# EAGLE board ESP32-Function-Panel (EAGLE 9.6.2), part 1 of 2
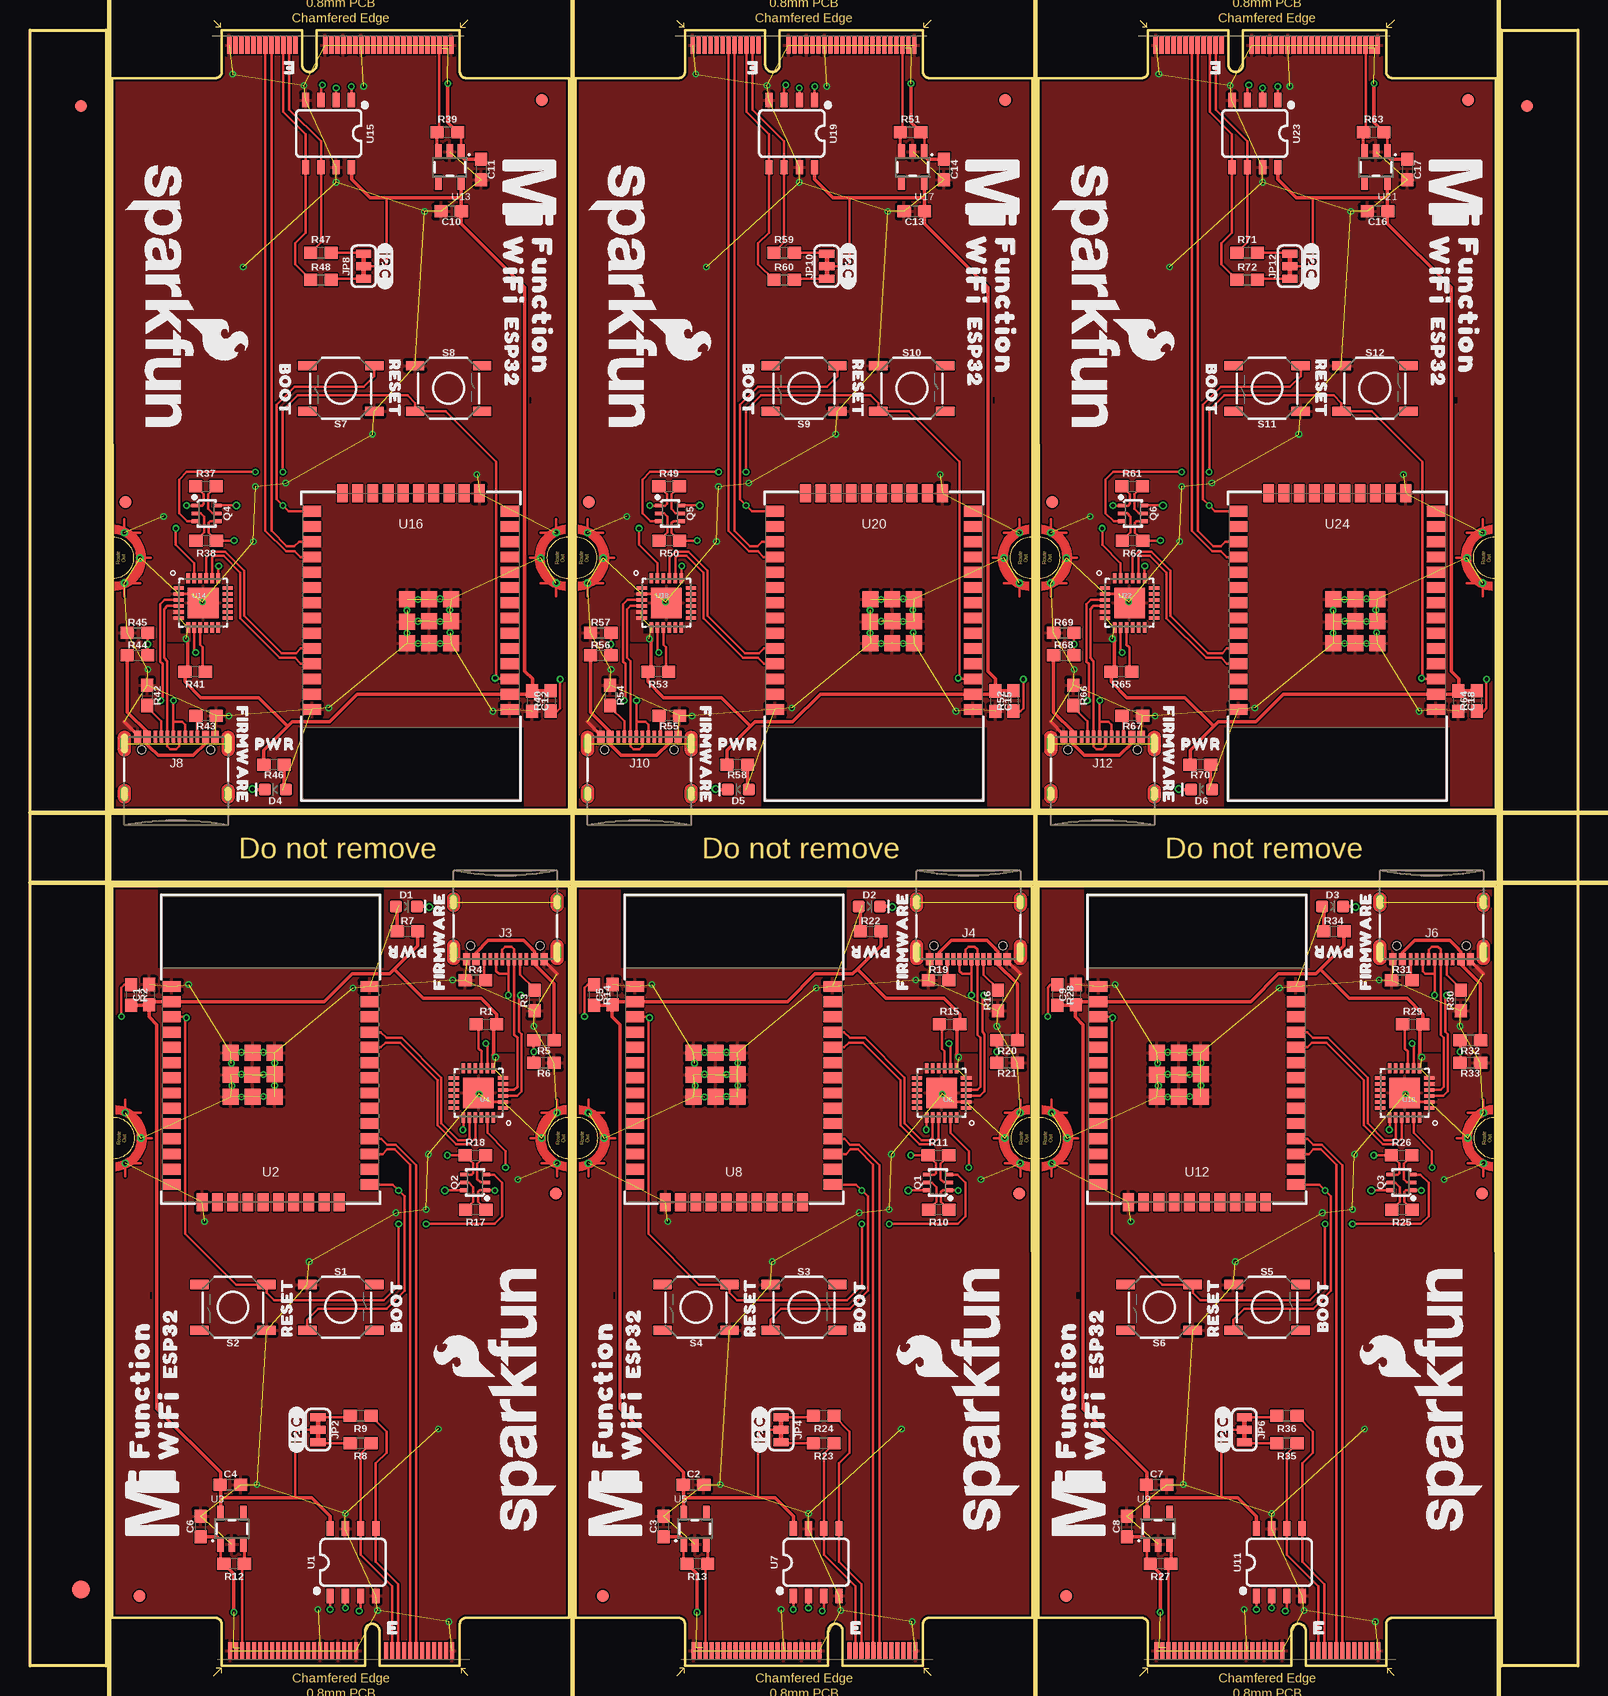
[diagram p0: board, top side]
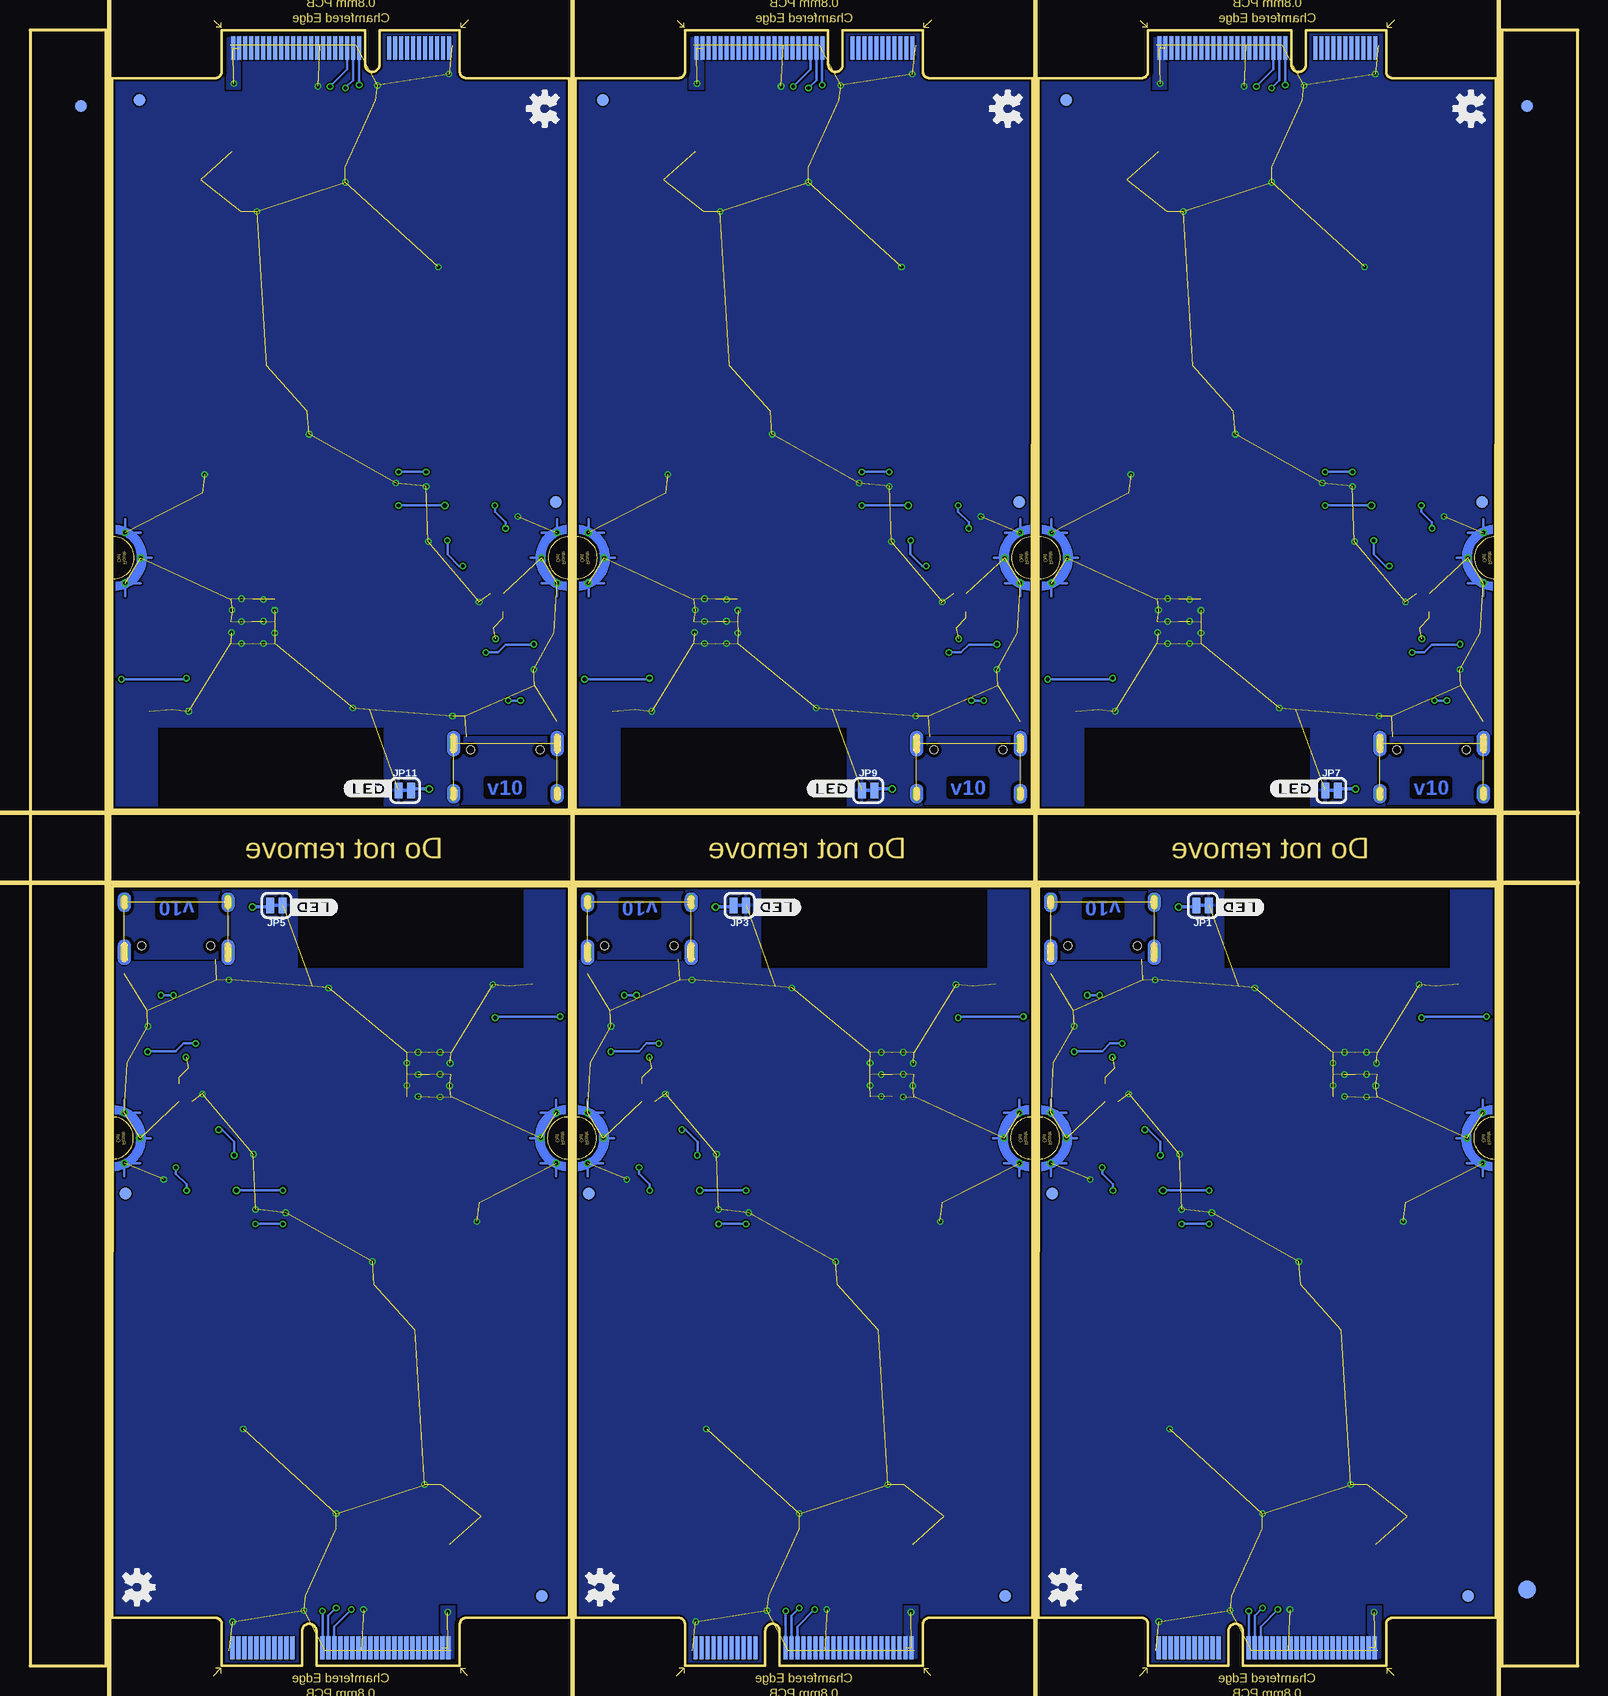
[diagram p1: board, bottom side, seen from below]

Size 129.03 x 136.32 mm. Coordinates in mm from the lower left corner, seen from the top.
Outline: 35.83,0 29.13,0 29.13,2.9 arc180 27.93,2.9 27.93,0 15.98,0 15.98,3.5 arc84 15.51,4 6.86,4 6.86,64.98 44.93,64.98 44.96,4 36.31,4 arc85 35.83,3.5 35.83,0
Outline: 74.44,0 67.74,0 67.74,2.9 arc180 66.54,2.9 66.54,0 54.59,0 54.59,3.5 arc84 54.12,4 45.47,4 45.47,64.98 83.54,64.98 83.57,4 74.92,4 arc85 74.44,3.5 74.44,0
Outline: 113.05,0 106.35,0 106.35,2.9 arc180 105.15,2.9 105.15,0 93.2,0 93.2,3.5 arc84 92.72,4 84.07,4 84.07,64.98 122.15,64.98 122.17,4 113.52,4 arc85 113.05,3.5 113.05,0
Outline: 15.98,136.32 22.68,136.32 22.68,133.42 arc180 23.88,133.42 23.88,136.32 35.83,136.32 35.83,132.82 arc84 36.31,132.32 44.96,132.32 44.96,71.34 6.88,71.34 6.86,132.32 15.51,132.32 arc85 15.98,132.82 15.98,136.32
Outline: 54.59,136.32 61.29,136.32 61.29,133.42 arc180 62.49,133.42 62.49,136.32 74.44,136.32 74.44,132.82 arc84 74.92,132.32 83.57,132.32 83.57,71.34 45.49,71.34 45.47,132.32 54.12,132.32 arc85 54.59,132.82 54.59,136.32
Outline: 93.2,136.32 99.9,136.32 99.9,133.42 arc180 101.1,133.42 101.1,136.32 113.05,136.32 113.05,132.82 arc84 113.52,132.32 122.17,132.32 122.17,71.34 84.1,71.34 84.07,132.32 92.72,132.32 arc85 93.2,132.82 93.2,136.32
Outline: 122.68,136.32 129.03,136.32 129.03,0 122.68,0 122.68,136.32
Outline: 0,136.32 6.35,136.32 6.35,0 0,0 0,136.32
Copper layers (1*16): Top 0.035mm / dielectric 1.5mm / Bottom 0.035mm
Design rules "ESP32-Function": minimum track width 5mil, minimum drill 0.3mm, track to track 5mil, track to pad 5mil, pad to pad 5mil, via to via 5mil, smd to smd 5mil, copper to edge 7mil, drill to drill 7mil, minimum pad ring 5mil, minimum via ring 5mil, stop-mask expansion 2.5mil, vias tented up to drill 25mil, thermal gap 10mil
tRestrict: area 10,30.6 to 10.2,31.1; area 10.7,58.2 to 29.5,64.8; area 48.6,30.6 to 48.8,31.1; area 49.3,58.2 to 68.1,64.8; area 87.2,30.6 to 87.4,31.1; area 87.9,58.2 to 106.7,64.8; area 41.7,105.2 to 41.8,105.7; area 22.4,71.6 to 41.1,78.2; area 80.3,105.2 to 80.4,105.7; area 61,71.6 to 79.8,78.2; area 118.9,105.2 to 119,105.7; area 99.6,71.6 to 118.4,78.2
bRestrict: area 10.7,58.2 to 29.5,64.8; area 49.3,58.2 to 68.1,64.8; area 87.9,58.2 to 106.7,64.8; area 22.4,71.6 to 41.1,78.2; area 61,71.6 to 79.8,78.2; area 99.6,71.6 to 118.4,78.2
Milling: 6 lines

## Footprints (pad centres in the part's own frame; a part is rotated, then mirrored left to right if it is on the bottom)
0603 = smd 1.1 x 1: 1 -0.85,0; 2 0.85,0
LED-0603 = smd 1 x 1: A -0.877,0; C 0.877,0
FIDUCIAL-1X2 = smd 1 x 1: 1 0,0
FIDUCIAL-1.5X3 = smd 1.5 x 1.5: 1 0,0
M.2-CARD-E-22_FUNCTION_STANDARD = smd 0.35 x 1.45: 1 9.25,1.275; 3 8.75,1.275; 5 8.25,1.275; 7 7.75,1.275; 9 7.25,1.275; 11 6.75,1.275; 13 6.25,1.275; 15 5.75,1.275; 17 5.25,1.275; 19 4.75,1.275; 21 4.25,1.275; 23 3.75,1.275; 33 1.25,1.275; 35 0.75,1.275; 37 0.25,1.275; 39 -0.25,1.275; 41 -0.75,1.275; 43 -1.25,1.275; 45 -1.75,1.275; 47 -2.25,1.275; 49 -2.75,1.275; 51 -3.25,1.275; 53 -3.75,1.275; 55 -4.25,1.275; 57 -4.75,1.275; 59 -5.25,1.275; 61 -5.75,1.275; 63 -6.25,1.275; 65 -6.75,1.275; 67 -7.25,1.275; 69 -7.75,1.275; 71 -8.25,1.275; 73 -8.75,1.275; 75 -9.25,1.275 | smd 0.35 x 1.95 bottom: 2 9,1.525; 4 8.5,1.525; 6 8,1.525; 8 7.5,1.525; 10 7,1.525; 12 6.5,1.525; 14 6,1.525; 16 5.5,1.525; 18 5,1.525; 20 4.5,1.525; 22 4,1.525; 32 1.5,1.525; 34 1,1.525; 36 0.5,1.525; 38 0,1.525; 40 -0.5,1.525; 42 -1,1.525; 44 -1.5,1.525; 46 -2,1.525; 48 -2.5,1.525; 50 -3,1.525; 52 -3.5,1.525; 54 -4,1.525; 56 -4.5,1.525; 58 -5,1.525; 60 -5.5,1.525; 62 -6,1.525; 64 -6.5,1.525; 66 -7,1.525; 68 -7.5,1.525; 70 -8,1.525; 72 -8.5,1.525; 74 -9,1.525 | drill 0.305 pad 0.61: GND1 -18,41.9; GND2 -16.7,44; GND3 -18,46.1; GND4 18,41.9; GND5 16.7,44; GND6 18,46.1
USB-C-16P-2LAYER-PADS = smd 0.3 x 1: A5 -1.25,-0.34; A6 -0.25,-0.34; A7 0.25,-0.34; A8 1.25,-0.34; B5 1.75,-0.34; B6 0.75,-0.34; B7 -0.75,-0.34; B8 -1.75,-0.34 | smd 0.6 x 1: GND -3.225,-0.34; GND2 3.225,-0.34; VBUS1 -2.45,-0.34; VBUS2 2.45,-0.34 | drill 0.4 pad 0.6 long: SHLD1 -4.318,-0.915; SHLD2 4.318,-0.915; SHLD3 -4.318,-5.095; SHLD4 4.318,-5.095 | hole 0.65: -2.89,-1.445; 2.89,-1.445
SMT-JUMPER_2_NC_TRACE_SILK = smd 0.66 x 1.27: 1 -0.521,0; 2 0.521,0
SMT-JUMPER_3_2-NC_TRACE_SILK = smd 0.66 x 1.27: 1 -1.041,0; 2 0,0; 3 1.041,0
SC70-6 = smd 0.3 x 0.66: 1 -0.65,-0.92; 2 0,-0.92; 3 0.65,-0.92; 4 0.65,0.92; 5 0,0.92; 6 -0.65,0.92
TACTILE_SWITCH_SMD_5.2MM = smd 1.524 x 0.762: 1 -2.794,1.905; 2 2.794,1.905; 3 -2.794,-1.905; 4 2.794,-1.905
TP_15TH = drill 0.381 pad 0.61: 1 0,0
SO08 = smd 0.6 x 1.2: 1 -1.905,-2.8; 2 -0.635,-2.8; 3 0.635,-2.8; 4 1.905,-2.8; 5 1.905,2.8; 6 0.635,2.8; 7 -0.635,2.8; 8 -1.905,2.8
ESP-WROOM-32D-NARROW = smd 0.9 x 1.5: 1 6.43,8.238; 2 5.16,8.238; 3 3.89,8.238; 4 2.62,8.238; 5 1.35,8.238; 6 0.08,8.238; 7 -1.19,8.238; 8 -2.46,8.238; 9 -3.73,8.238; 10 -5,8.238; 11 -6.27,8.238; 12 -7.54,8.238; 13 -8.81,8.238; 14 -10.08,8.238; 25 -10.08,-8.238; 26 -8.81,-8.238; 27 -7.54,-8.238; 28 -6.27,-8.238; 29 -5,-8.238; 30 -3.73,-8.238; 31 -2.46,-8.238; 32 -1.19,-8.238; 33 0.08,-8.238; 34 1.35,-8.238; 35 2.62,-8.238; 36 3.89,-8.238; 37 5.16,-8.238; 38 6.43,-8.238 | smd 1.5 x 0.9: 15 -11.57,5.715; 16 -11.57,4.445; 17 -11.57,3.175; 18 -11.57,1.905; 19 -11.57,0.635; 20 -11.57,-0.635; 21 -11.57,-1.905; 22 -11.57,-3.175; 23 -11.57,-4.445; 24 -11.57,-5.715 | smd 1.33 x 1.33: GND1 -0.912,1.531; GNDT1 -2.751,3.346; GNDT2 -2.761,1.516; GNDT3 -2.751,-0.314; GNDT4 -0.891,-0.324; GNDT5 0.909,-0.314; GNDT6 0.909,1.516; GNDT7 0.909,3.346; GNDT8 -0.921,3.346
SOT23-5 = smd 0.55 x 1.2: 1 -0.95,-1.3; 2 0,-1.3; 3 0.95,-1.3; 4 0.95,1.3; 5 -0.95,1.3
QFN24 = smd 0.85 x 0.3: 1 -2.05,1.25; 2 -2.05,0.75; 3 -2.05,0.25; 4 -2.05,-0.25; 5 -2.05,-0.75; 6 -2.05,-1.25; 13 2.05,-1.25; 14 2.05,-0.75; 15 2.05,-0.25; 16 2.05,0.25; 17 2.05,0.75; 18 2.05,1.25 | smd 0.3 x 0.85: 7 -1.25,-2.05; 8 -0.75,-2.05; 9 -0.25,-2.05; 10 0.25,-2.05; 11 0.75,-2.05; 12 1.25,-2.05; 19 1.25,2.05; 20 0.75,2.05; 21 0.25,2.05; 22 -0.25,2.05; 23 -0.75,2.05; 24 -1.25,2.05 | smd 2.55 x 2.55: PAD 0,0

## Placement (x,y rotation side)
C1  0.1uF  [0603]  9.96,55.93 90 top
C2  1.0uF  [0603]  55.31,15.11 0 top
C3  1.0uF  [0603]  52.83,11.62 90 top
C4  1.0uF  [0603]  16.7,15.11 0 top
C5  0.1uF  [0603]  48.56,55.93 90 top
C6  1.0uF  [0603]  14.22,11.62 90 top
C7  1.0uF  [0603]  93.92,15.11 0 top
C8  1.0uF  [0603]  91.44,11.62 90 top
C9  0.1uF  [0603]  87.17,55.93 90 top
C10  1.0uF  [0603]  35.12,121.21 180 top
C11  1.0uF  [0603]  37.59,124.7 270 top
C12  0.1uF  [0603]  41.86,80.39 270 top
C13  1.0uF  [0603]  73.72,121.21 180 top
C14  1.0uF  [0603]  76.2,124.7 270 top
C15  0.1uF  [0603]  80.47,80.39 270 top
C16  1.0uF  [0603]  112.33,121.21 180 top
C17  1.0uF  [0603]  114.81,124.7 270 top
C18  0.1uF  [0603]  119.08,80.39 270 top
D1  RED  [LED-0603]  31.37,63.3 0 top
D2  RED  [LED-0603]  69.98,63.3 0 top
D3  RED  [LED-0603]  108.59,63.3 0 top
D4  RED  [LED-0603]  20.45,73.03 180 top
D5  RED  [LED-0603]  59.05,73.03 180 top
D6  RED  [LED-0603]  97.66,73.03 180 top
E$1  [FIDUCIAL-1X2]  4.23,129.97 0 top
E$2  [FIDUCIAL-1X2]  4.23,129.97 0 bottom
E$3  [FIDUCIAL-1X2]  124.8,129.97 0 top
E$4  [FIDUCIAL-1X2]  124.8,129.97 0 bottom
E$5  [FIDUCIAL-1.5X3]  4.23,6.35 0 top
E$6  [FIDUCIAL-1.5X3]  4.23,6.35 0 bottom
FD1  FIDUCIAL1X2  [FIDUCIAL-1X2]  9.14,5.84 270 bottom
FD2  FIDUCIAL1X2  [FIDUCIAL-1X2]  43.84,39.34 270 bottom
FD3  FIDUCIAL1X2  [FIDUCIAL-1X2]  9.14,5.84 90 top
FD4  FIDUCIAL1X2  [FIDUCIAL-1X2]  43.84,39.34 90 top
FD5  FIDUCIAL1X2  [FIDUCIAL-1X2]  47.75,5.84 270 bottom
FD6  FIDUCIAL1X2  [FIDUCIAL-1X2]  47.75,5.84 90 top
FD7  FIDUCIAL1X2  [FIDUCIAL-1X2]  82.45,39.34 270 bottom
FD8  FIDUCIAL1X2  [FIDUCIAL-1X2]  82.45,39.34 90 top
FD9  FIDUCIAL1X2  [FIDUCIAL-1X2]  86.36,5.84 270 bottom
FD10  FIDUCIAL1X2  [FIDUCIAL-1X2]  86.36,5.84 90 top
FD11  FIDUCIAL1X2  [FIDUCIAL-1X2]  121.06,39.34 270 bottom
FD12  FIDUCIAL1X2  [FIDUCIAL-1X2]  121.06,39.34 90 top
FD13  FIDUCIAL1X2  [FIDUCIAL-1X2]  42.67,130.48 90 bottom
FD14  FIDUCIAL1X2  [FIDUCIAL-1X2]  42.67,130.48 270 top
FD15  FIDUCIAL1X2  [FIDUCIAL-1X2]  7.98,96.98 90 bottom
FD16  FIDUCIAL1X2  [FIDUCIAL-1X2]  7.98,96.98 270 top
FD17  FIDUCIAL1X2  [FIDUCIAL-1X2]  81.28,130.48 90 bottom
FD18  FIDUCIAL1X2  [FIDUCIAL-1X2]  81.28,130.48 270 top
FD19  FIDUCIAL1X2  [FIDUCIAL-1X2]  46.58,96.98 90 bottom
FD20  FIDUCIAL1X2  [FIDUCIAL-1X2]  46.58,96.98 270 top
FD21  FIDUCIAL1X2  [FIDUCIAL-1X2]  119.89,130.48 90 bottom
FD22  FIDUCIAL1X2  [FIDUCIAL-1X2]  119.89,130.48 270 top
FD23  FIDUCIAL1X2  [FIDUCIAL-1X2]  85.19,96.98 90 bottom
FD24  FIDUCIAL1X2  [FIDUCIAL-1X2]  85.19,96.98 270 top
J1  MICROMOD_STANDARD  [M.2-CARD-E-22_FUNCTION_STANDARD]  25.94,-0.01 0 top
J2  MICROMOD_STANDARD  [M.2-CARD-E-22_FUNCTION_STANDARD]  64.55,-0.01 0 top
J3  [USB-C-16P-2LAYER-PADS]  39.62,58.55 180 top
J4  [USB-C-16P-2LAYER-PADS]  78.23,58.55 180 top
J5  MICROMOD_STANDARD  [M.2-CARD-E-22_FUNCTION_STANDARD]  103.16,-0.01 0 top
J6  [USB-C-16P-2LAYER-PADS]  116.84,58.55 180 top
J7  MICROMOD_STANDARD  [M.2-CARD-E-22_FUNCTION_STANDARD]  25.87,136.33 180 top
J8  [USB-C-16P-2LAYER-PADS]  12.19,77.77 0 top
J9  MICROMOD_STANDARD  [M.2-CARD-E-22_FUNCTION_STANDARD]  64.48,136.33 180 top
J10  [USB-C-16P-2LAYER-PADS]  50.8,77.77 0 top
J11  MICROMOD_STANDARD  [M.2-CARD-E-22_FUNCTION_STANDARD]  103.09,136.33 180 top
J12  [USB-C-16P-2LAYER-PADS]  89.41,77.77 0 top
JP1  JUMPER-SMT_2_NC_TRACE_SILK  [SMT-JUMPER_2_NC_TRACE_SILK]  31.27,63.37 180 bottom
JP2  JUMPER-SMT_3_2-NC_TRACE_SILK  [SMT-JUMPER_3_2-NC_TRACE_SILK]  24,19.68 270 top
JP3  JUMPER-SMT_2_NC_TRACE_SILK  [SMT-JUMPER_2_NC_TRACE_SILK]  69.88,63.37 180 bottom
JP4  JUMPER-SMT_3_2-NC_TRACE_SILK  [SMT-JUMPER_3_2-NC_TRACE_SILK]  62.61,19.68 270 top
JP5  JUMPER-SMT_2_NC_TRACE_SILK  [SMT-JUMPER_2_NC_TRACE_SILK]  108.48,63.37 180 bottom
JP6  JUMPER-SMT_3_2-NC_TRACE_SILK  [SMT-JUMPER_3_2-NC_TRACE_SILK]  101.22,19.68 270 top
JP7  JUMPER-SMT_2_NC_TRACE_SILK  [SMT-JUMPER_2_NC_TRACE_SILK]  20.55,72.95 0 bottom
JP8  JUMPER-SMT_3_2-NC_TRACE_SILK  [SMT-JUMPER_3_2-NC_TRACE_SILK]  27.81,116.64 90 top
JP9  JUMPER-SMT_2_NC_TRACE_SILK  [SMT-JUMPER_2_NC_TRACE_SILK]  59.16,72.95 0 bottom
JP10  JUMPER-SMT_3_2-NC_TRACE_SILK  [SMT-JUMPER_3_2-NC_TRACE_SILK]  66.42,116.64 90 top
JP11  JUMPER-SMT_2_NC_TRACE_SILK  [SMT-JUMPER_2_NC_TRACE_SILK]  97.76,72.95 0 bottom
JP12  JUMPER-SMT_3_2-NC_TRACE_SILK  [SMT-JUMPER_3_2-NC_TRACE_SILK]  105.03,116.64 90 top
LOGO1  SFE_LOGO_NAME_FLAME.2_INCH  [SFE_LOGO_NAME_FLAME_.2]  79.6,22.25 90 top
LOGO2  SFE_LOGO_NAME_FLAME.2_INCH  [SFE_LOGO_NAME_FLAME_.2]  41,22.25 90 top
LOGO3  OSHW-LOGOS  [OSHW-LOGO-S]  42.9,6.55 270 bottom
LOGO4  OSHW-LOGOS  [OSHW-LOGO-S]  81.51,6.55 270 bottom
LOGO5  SFE_LOGO_NAME_FLAME.2_INCH  [SFE_LOGO_NAME_FLAME_.2]  118.21,22.25 90 top
LOGO6  OSHW-LOGOS  [OSHW-LOGO-S]  120.12,6.55 270 bottom
LOGO7  SFE_LOGO_NAME_FLAME.2_INCH  [SFE_LOGO_NAME_FLAME_.2]  10.82,114.07 270 top
LOGO8  OSHW-LOGOS  [OSHW-LOGO-S]  8.92,129.77 90 bottom
LOGO9  SFE_LOGO_NAME_FLAME.2_INCH  [SFE_LOGO_NAME_FLAME_.2]  49.43,114.07 270 top
LOGO10  OSHW-LOGOS  [OSHW-LOGO-S]  47.52,129.77 90 bottom
LOGO11  SFE_LOGO_NAME_FLAME.2_INCH  [SFE_LOGO_NAME_FLAME_.2]  88.04,114.07 270 top
LOGO12  OSHW-LOGOS  [OSHW-LOGO-S]  86.13,129.77 90 bottom
Q1  MBT3904DW1T1  [SC70-6]  75.7,40.28 90 top
Q2  MBT3904DW1T1  [SC70-6]  37.09,40.28 90 top
Q3  MBT3904DW1T1  [SC70-6]  114.31,40.28 90 top
Q4  MBT3904DW1T1  [SC70-6]  14.73,96.04 270 top
Q5  MBT3904DW1T1  [SC70-6]  53.33,96.04 270 top
Q6  MBT3904DW1T1  [SC70-6]  91.94,96.04 270 top
R1  10k  [0603]  38.05,53.47 0 top
R2  10k  [0603]  8.43,55.91 270 top
R3  5.1k  [0603]  42.06,55.45 90 top
R4  5.1k  [0603]  37.13,57.15 0 top
R5  22k  [0603]  42.85,52.12 180 top
R6  33k  [0603]  42.85,50.24 180 top
R7  1k  [0603]  31.47,61.21 0 top
R8  4.7k  [0603]  27.56,18.54 180 top
R9  4.7k  [0603]  27.56,20.83 180 top
R10  10k  [0603]  75.76,38.02 180 top
R11  10k  [0603]  75.73,42.55 0 top
R12  100k  [0603]  17.02,8.51 180 top
R13  100k  [0603]  55.63,8.51 180 top
R14  10k  [0603]  47.04,55.91 270 top
R15  10k  [0603]  76.66,53.47 0 top
R16  5.1k  [0603]  80.67,55.45 90 top
R17  10k  [0603]  37.15,38.02 180 top
R18  10k  [0603]  37.13,42.55 0 top
R19  5.1k  [0603]  75.74,57.15 0 top
R20  22k  [0603]  81.46,52.12 180 top
R21  33k  [0603]  81.46,50.24 180 top
R22  1k  [0603]  70.08,61.21 0 top
R23  4.7k  [0603]  66.17,18.54 180 top
R24  4.7k  [0603]  66.17,20.83 180 top
R25  10k  [0603]  114.37,38.02 180 top
R26  10k  [0603]  114.34,42.55 0 top
R27  100k  [0603]  94.23,8.51 180 top
R28  10k  [0603]  85.65,55.91 270 top
R29  10k  [0603]  115.27,53.47 0 top
R30  5.1k  [0603]  119.28,55.45 90 top
R31  5.1k  [0603]  114.35,57.15 0 top
R32  22k  [0603]  120.07,52.12 180 top
R33  33k  [0603]  120.07,50.24 180 top
R34  1k  [0603]  108.69,61.21 0 top
R35  4.7k  [0603]  104.78,18.54 180 top
R36  4.7k  [0603]  104.78,20.83 180 top
R37  10k  [0603]  14.67,98.3 0 top
R38  10k  [0603]  14.69,93.78 180 top
R39  100k  [0603]  34.8,127.81 0 top
R40  10k  [0603]  43.38,80.42 90 top
R41  10k  [0603]  13.77,82.85 180 top
R42  5.1k  [0603]  9.75,80.87 270 top
R43  5.1k  [0603]  14.68,79.17 180 top
R44  22k  [0603]  8.97,84.2 0 top
R45  33k  [0603]  8.97,86.08 0 top
R46  1k  [0603]  20.35,75.11 180 top
R47  4.7k  [0603]  24.26,117.78 0 top
R48  4.7k  [0603]  24.26,115.49 0 top
R49  10k  [0603]  53.27,98.3 0 top
R50  10k  [0603]  53.3,93.78 180 top
R51  100k  [0603]  73.41,127.81 0 top
R52  10k  [0603]  81.99,80.42 90 top
R53  10k  [0603]  52.37,82.85 180 top
R54  5.1k  [0603]  48.36,80.87 270 top
R55  5.1k  [0603]  53.29,79.17 180 top
R56  22k  [0603]  47.57,84.2 0 top
R57  33k  [0603]  47.57,86.08 0 top
R58  1k  [0603]  58.95,75.11 180 top
R59  4.7k  [0603]  62.86,117.78 0 top
R60  4.7k  [0603]  62.86,115.49 0 top
R61  10k  [0603]  91.88,98.3 0 top
R62  10k  [0603]  91.91,93.78 180 top
R63  100k  [0603]  112.01,127.81 0 top
R64  10k  [0603]  120.6,80.42 90 top
R65  10k  [0603]  90.98,82.85 180 top
R66  5.1k  [0603]  86.97,80.87 270 top
R67  5.1k  [0603]  91.9,79.17 180 top
R68  22k  [0603]  86.18,84.2 0 top
R69  33k  [0603]  86.18,86.08 0 top
R70  1k  [0603]  97.56,75.11 180 top
R71  4.7k  [0603]  101.47,117.78 0 top
R72  4.7k  [0603]  101.47,115.49 0 top
S1  MOMENTARY-SWITCH-SPST-SMD-5.2MM-TALL  [TACTILE_SWITCH_SMD_5.2MM]  25.91,29.87 0 top
S2  MOMENTARY-SWITCH-SPST-SMD-5.2MM-TALL  [TACTILE_SWITCH_SMD_5.2MM]  16.92,29.87 180 top
S3  MOMENTARY-SWITCH-SPST-SMD-5.2MM-TALL  [TACTILE_SWITCH_SMD_5.2MM]  64.52,29.87 0 top
S4  MOMENTARY-SWITCH-SPST-SMD-5.2MM-TALL  [TACTILE_SWITCH_SMD_5.2MM]  55.52,29.87 180 top
S5  MOMENTARY-SWITCH-SPST-SMD-5.2MM-TALL  [TACTILE_SWITCH_SMD_5.2MM]  103.12,29.87 0 top
S6  MOMENTARY-SWITCH-SPST-SMD-5.2MM-TALL  [TACTILE_SWITCH_SMD_5.2MM]  94.13,29.87 180 top
S7  MOMENTARY-SWITCH-SPST-SMD-5.2MM-TALL  [TACTILE_SWITCH_SMD_5.2MM]  25.91,106.45 180 top
S8  MOMENTARY-SWITCH-SPST-SMD-5.2MM-TALL  [TACTILE_SWITCH_SMD_5.2MM]  34.9,106.45 0 top
S9  MOMENTARY-SWITCH-SPST-SMD-5.2MM-TALL  [TACTILE_SWITCH_SMD_5.2MM]  64.52,106.45 180 top
S10  MOMENTARY-SWITCH-SPST-SMD-5.2MM-TALL  [TACTILE_SWITCH_SMD_5.2MM]  73.51,106.45 0 top
S11  MOMENTARY-SWITCH-SPST-SMD-5.2MM-TALL  [TACTILE_SWITCH_SMD_5.2MM]  103.12,106.45 180 top
S12  MOMENTARY-SWITCH-SPST-SMD-5.2MM-TALL  [TACTILE_SWITCH_SMD_5.2MM]  112.12,106.45 0 top
TP1  TEST-POINTTP_15TH_THRU  [TP_15TH]  73.2,39.62 90 top
TP2  TEST-POINTTP_15TH_THRU  [TP_15TH]  34.59,39.62 90 top
TP3  TEST-POINTTP_15TH_THRU  [TP_15TH]  111.81,39.62 90 top
TP4  TEST-POINTTP_15TH_THRU  [TP_15TH]  17.22,96.7 270 top
TP5  TEST-POINTTP_15TH_THRU  [TP_15TH]  55.83,96.7 270 top
TP6  TEST-POINTTP_15TH_THRU  [TP_15TH]  94.44,96.7 270 top
U1  EEPROM  [SO08]  26.92,8.64 0 top
U2  ESP-WROOM-3232D-NARROW  [ESP-WROOM-32D-NARROW]  20.07,50.19 90 top
U3  3.3V  [SOT23-5]  16.83,11.43 0 top
U4  CP210X  [QFN24]  37.38,47.74 180 top
U5  3.3V  [SOT23-5]  55.43,11.43 0 top
U6  CP210X  [QFN24]  75.99,47.74 180 top
U7  EEPROM  [SO08]  65.53,8.64 0 top
U8  ESP-WROOM-3232D-NARROW  [ESP-WROOM-32D-NARROW]  58.67,50.19 90 top
U9  3.3V  [SOT23-5]  94.04,11.43 0 top
U10  CP210X  [QFN24]  114.6,47.74 180 top
U11  EEPROM  [SO08]  104.14,8.64 0 top
U12  ESP-WROOM-3232D-NARROW  [ESP-WROOM-32D-NARROW]  97.28,50.19 90 top
U13  3.3V  [SOT23-5]  34.99,124.89 180 top
U14  CP210X  [QFN24]  14.43,88.58 0 top
U15  EEPROM  [SO08]  24.89,127.69 180 top
U16  ESP-WROOM-3232D-NARROW  [ESP-WROOM-32D-NARROW]  31.75,86.13 270 top
U17  3.3V  [SOT23-5]  73.6,124.89 180 top
U18  CP210X  [QFN24]  53.04,88.58 0 top
U19  EEPROM  [SO08]  63.5,127.69 180 top
U20  ESP-WROOM-3232D-NARROW  [ESP-WROOM-32D-NARROW]  70.36,86.13 270 top
U21  3.3V  [SOT23-5]  112.21,124.89 180 top
U22  CP210X  [QFN24]  91.65,88.58 0 top
U23  EEPROM  [SO08]  102.11,127.69 180 top
U24  ESP-WROOM-3232D-NARROW  [ESP-WROOM-32D-NARROW]  108.97,86.13 270 top
U$1  [BOOT3221]  30.56,30 90 top
U$2  [FUNCTION521]  9.14,22.99 90 top
U$3  [#I2C#1321540313558]  22.23,19.68 90 top
U$4  [ESP3212]  11.68,26.87 90 top
U$5  [RESET3220]  21.41,29.87 90 top
U$6  [MICROMOD_MI_LOGO_1]  10.16,13.59 90 top
U$7  [FIRMWARE3223]  34.11,60.38 90 top
U$8  [#LED#8]  28.27,63.22 180 bottom
U$9  [PWR3215]  31.42,59.51 180 top
U$10  [WIFI525]  11.56,20.07 90 top
U$11  [BOOT3221]  69.16,30 90 top
U$12  [ESP3212]  50.29,26.87 90 top
U$13  [FIRMWARE3223]  72.72,60.38 90 top
U$14  [RESET3220]  60.02,29.87 90 top
U$15  [#LED#8]  66.88,63.22 180 bottom
U$16  [PWR3215]  70.03,59.51 180 top
U$17  [FUNCTION521]  47.75,22.99 90 top
U$18  [MICROMOD_MI_LOGO_1]  48.77,13.59 90 top
U$19  [WIFI525]  50.16,20.07 90 top
U$20  [#I2C#1321540313558]  60.83,19.68 90 top
U$21  [BOOT3221]  107.77,30 90 top
U$22  [ESP3212]  88.9,26.87 90 top
U$23  [FIRMWARE3223]  111.33,60.38 90 top
U$24  [RESET3220]  98.63,29.87 90 top
U$25  [#LED#8]  105.49,63.22 180 bottom
U$26  [PWR3215]  108.64,59.51 180 top
U$27  [FUNCTION521]  86.36,22.99 90 top
U$28  [MICROMOD_MI_LOGO_1]  87.38,13.59 90 top
U$29  [WIFI525]  88.77,20.07 90 top
U$30  [#I2C#1321540313558]  99.44,19.68 90 top
U$31  [BOOT3221]  21.26,106.32 270 top
U$32  [ESP3212]  40.13,109.45 270 top
U$33  [FIRMWARE3223]  17.7,75.95 270 top
U$34  [RESET3220]  30.4,106.45 270 top
U$35  [#LED#8]  23.55,73.1 0 bottom
U$36  [PWR3215]  20.4,76.81 0 top
U$37  [FUNCTION521]  42.67,113.33 270 top
U$38  [MICROMOD_MI_LOGO_1]  41.66,122.73 270 top
U$39  [WIFI525]  40.26,116.26 270 top
U$40  [#I2C#1321540313558]  29.59,116.64 270 top
U$41  [BOOT3221]  59.87,106.32 270 top
U$42  [ESP3212]  78.74,109.45 270 top
U$43  [FIRMWARE3223]  56.31,75.95 270 top
U$44  [RESET3220]  69.01,106.45 270 top
U$45  [#LED#8]  62.15,73.1 0 bottom
U$46  [PWR3215]  59,76.81 0 top
U$47  [FUNCTION521]  81.28,113.33 270 top
U$48  [MICROMOD_MI_LOGO_1]  80.26,122.73 270 top
U$49  [WIFI525]  78.87,116.26 270 top
U$50  [#I2C#1321540313558]  68.2,116.64 270 top
U$51  [BOOT3221]  98.48,106.32 270 top
U$52  [ESP3212]  117.35,109.45 270 top
U$53  [FIRMWARE3223]  94.92,75.95 270 top
U$54  [RESET3220]  107.62,106.45 270 top
U$55  [#LED#8]  100.76,73.1 0 bottom
U$56  [PWR3215]  97.61,76.81 0 top
U$57  [FUNCTION521]  119.89,113.33 270 top
U$58  [MICROMOD_MI_LOGO_1]  118.87,122.73 270 top
U$59  [WIFI525]  117.48,116.26 270 top
U$60  [#I2C#1321540313558]  106.81,116.64 270 top

## Library data of the parts
C1 C5 C9 C12 C15 C18 = SparkFun-Capacitors; PROD_ID: CAP-00810
C2-C4 C6-C8 C10 C11 C13 C14 C16 C17 = SparkFun-Capacitors; PROD_ID: CAP-00868
D1-D6 = SparkFun-LED; PROD_ID: DIO-00819
E$1-E$4 FD1-FD24 LOGO1-LOGO12 = SparkFun-Aesthetics
E$5 E$6 = SparkFun-Retired
J1 J2 J5 J7 J9 J11 = SparkFun-MicroMod-Function
J3 J4 J6 J8 J10 J12 = SparkFun-Connectors; PROD_ID: CONN-14122
JP1-JP12 = SparkFun-Jumpers
Q1-Q6 = SparkFun-DiscreteSemi; PROD_ID: TRANS-13337
R1 R2 R10 R11 R14 R15 R17 R18 R25 R26 R28 R29 R37 R38 R40 R41 R49 R50 R52 R53 R61 R62 R64 R65 = SparkFun-Resistors; PROD_ID: RES-00824
R3 R4 R16 R19 R30 R31 R42 R43 R54 R55 R66 R67 = SparkFun-Resistors; PROD_ID: RES-12083
R5 R20 R32 R44 R56 R68 = SparkFun-Resistors; PROD_ID: RES-07853
R6 R21 R33 R45 R57 R69 = SparkFun-Resistors; PROD_ID: RES-08416
R7 R22 R34 R46 R58 R70 = SparkFun-Resistors; PROD_ID: RES-07856
R8 R9 R23 R24 R35 R36 R47 R48 R59 R60 R71 R72 = SparkFun-Resistors; PROD_ID: RES-07857
R12 R13 R27 R39 R51 R63 = SparkFun-Resistors; PROD_ID: RES-07828
S1-S12 = SparkFun-Switches; PROD_ID: SWCH-14139
TP1-TP6 = SparkFun-Connectors
U1 U7 U11 U15 U19 U23 = SparkFun-IC-Memory; PROD_ID: IC-14645
U2 U8 U12 U16 U20 U24 = SparkFun-RF; PROD_ID: IC-15676
U3 U5 U9 U13 U17 U21 = SparkFun-IC-Power; PROD_ID: VREG-12457
U4 U6 U10 U14 U18 U22 = SparkFun-IC-Comms; PROD_ID: IC-14020
U$1-U$5 U$7-U$17 U$19-U$27 U$29-U$37 U$39-U$47 U$49-U$57 U$59 U$60 = top
U$6 U$18 U$28 U$38 U$48 U$58 = SparkFun-MicroMod

## Nets
0: Q2.6 S1.3 TP2.1 U2.25
1: Q1.6 S3.3 TP1.1 U8.25
2: Q3.6 S5.3 TP3.1 U12.25
3: Q4.6 S7.3 TP4.1 U16.25
3.3V: C1.1 C4.1 JP2.2 R1.2 R2.2 R7.2 U1.8 U2.2 U3.5 U4.5 U4.6 U4.7
3.3V1: C2.1 C5.1 JP4.2 R14.2 R15.2 R22.2 U5.5 U6.5 U6.6 U6.7 U7.8 U8.2
3.3V2: C7.1 C9.1 JP6.2 R28.2 R29.2 R34.2 U9.5 U10.5 U10.6 U10.7 U11.8 U12.2
3.3V3: C10.1 C12.1 JP8.2 R40.2 R41.2 R46.2 U13.5 U14.5 U14.6 U14.7 U15.8 U16.2
3.3V4: C13.1 C15.1 JP10.2 R52.2 R53.2 R58.2 U17.5 U18.5 U18.6 U18.7 U19.8 U20.2
3.3V5: C16.1 C18.1 JP12.2 R64.2 R65.2 R70.2 U21.5 U22.5 U22.6 U22.7 U23.8 U24.2
4: Q5.6 S9.3 TP5.1 U20.25
5: Q6.6 S11.3 TP6.1 U24.25
16/RX: J1.15 U2.27
16/RX1: J2.15 U8.27
16/RX2: J5.15 U12.27
16/RX3: J7.15 U16.27
16/RX4: J9.15 U20.27
16/RX5: J11.15 U24.27
17/TX: J1.13 U2.28
17/TX1: J2.13 U8.28
17/TX2: J5.13 U12.28
17/TX3: J7.13 U16.28
17/TX4: J9.13 U20.28
17/TX5: J11.13 U24.28
CHIP_PU: Q2.3 R2.1 S2.3 U2.3
CHIP_PU1: Q1.3 R14.1 S4.3 U8.3
CHIP_PU2: Q3.3 R28.1 S6.3 U12.3
CHIP_PU3: Q4.3 R40.1 S8.3 U16.3
CHIP_PU4: Q5.3 R52.1 S10.3 U20.3
CHIP_PU5: Q6.3 R64.1 S12.3 U24.3
D+: J3.A6 J3.B6 U4.3
D+1: J4.A6 J4.B6 U6.3
D+2: J6.A6 J6.B6 U10.3
D+3: J8.A6 J8.B6 U14.3
D+4: J10.A6 J10.B6 U18.3
D+5: J12.A6 J12.B6 U22.3
D-: J3.A7 J3.B7 U4.4
D-1: J4.A7 J4.B7 U6.4
D-2: J6.A7 J6.B7 U10.4
D-3: J8.A7 J8.B7 U14.4
D-4: J10.A7 J10.B7 U18.4
D-5: J12.A7 J12.B7 U22.4
DTR: Q2.1 R17.1 U4.23
DTR1: Q1.1 R10.1 U6.23
DTR2: Q3.1 R25.1 U10.23
DTR3: Q4.1 R37.1 U14.23
DTR4: Q5.1 R49.1 U18.23
DTR5: Q6.1 R61.1 U22.23
EN: J1.71 R12.1 U3.3
EN1: J2.71 R13.1 U5.3
EN2: J5.71 R27.1 U9.3
EN3: J7.71 R39.1 U13.3
EN4: J9.71 R51.1 U17.3
EN5: J11.71 R63.1 U21.3
GND: C1.2 C4.2 C6.2 J1.1 J1.33 J1.39 J1.45 J1.75 J1.GND1 J1.GND2 J1.GND3 J1.GND4 J1.GND5 J1.GND6 J3.GND J3.GND2 JP1.1 R3.1 R4.1 R6.1 S1.1 S2.1 U1.4 U1.7 U2.1 U2.15 U2.38 U2.GND1 U2.GNDT1 U2.GNDT2 U2.GNDT3 U2.GNDT4 U2.GNDT5 U2.GNDT6 U2.GNDT7 U2.GNDT8 U3.2 U4.2 U4.PAD
GND1: C2.2 C3.2 C5.2 J2.1 J2.33 J2.39 J2.45 J2.75 J2.GND1 J2.GND2 J2.GND3 J2.GND4 J2.GND5 J2.GND6 J4.GND J4.GND2 JP3.1 R16.1 R19.1 R21.1 S3.1 S4.1 U5.2 U6.2 U6.PAD U7.4 U7.7 U8.1 U8.15 U8.38 U8.GND1 U8.GNDT1 U8.GNDT2 U8.GNDT3 U8.GNDT4 U8.GNDT5 U8.GNDT6 U8.GNDT7 U8.GNDT8
GND2: C7.2 C8.2 C9.2 J5.1 J5.33 J5.39 J5.45 J5.75 J5.GND1 J5.GND2 J5.GND3 J5.GND4 J5.GND5 J5.GND6 J6.GND J6.GND2 JP5.1 R30.1 R31.1 R33.1 S5.1 S6.1 U9.2 U10.2 U10.PAD U11.4 U11.7 U12.1 U12.15 U12.38 U12.GND1 U12.GNDT1 U12.GNDT2 U12.GNDT3 U12.GNDT4 U12.GNDT5 U12.GNDT6 U12.GNDT7 U12.GNDT8
GND3: C10.2 C11.2 C12.2 J7.1 J7.33 J7.39 J7.45 J7.75 J7.GND1 J7.GND2 J7.GND3 J7.GND4 J7.GND5 J7.GND6 J8.GND J8.GND2 JP7.1 R42.1 R43.1 R45.1 S7.1 S8.1 U13.2 U14.2 U14.PAD U15.4 U15.7 U16.1 U16.15 U16.38 U16.GND1 U16.GNDT1 U16.GNDT2 U16.GNDT3 U16.GNDT4 U16.GNDT5 U16.GNDT6 U16.GNDT7 U16.GNDT8
GND4: C13.2 C14.2 C15.2 J9.1 J9.33 J9.39 J9.45 J9.75 J9.GND1 J9.GND2 J9.GND3 J9.GND4 J9.GND5 J9.GND6 J10.GND J10.GND2 JP9.1 R54.1 R55.1 R57.1 S9.1 S10.1 U17.2 U18.2 U18.PAD U19.4 U19.7 U20.1 U20.15 U20.38 U20.GND1 U20.GNDT1 U20.GNDT2 U20.GNDT3 U20.GNDT4 U20.GNDT5 U20.GNDT6 U20.GNDT7 U20.GNDT8
GND5: C16.2 C17.2 C18.2 J11.1 J11.33 J11.39 J11.45 J11.75 J11.GND1 J11.GND2 J11.GND3 J11.GND4 J11.GND5 J11.GND6 J12.GND J12.GND2 JP11.1 R66.1 R67.1 R69.1 S11.1 S12.1 U21.2 U22.2 U22.PAD U23.4 U23.7 U24.1 U24.15 U24.38 U24.GND1 U24.GNDT1 U24.GNDT2 U24.GNDT3 U24.GNDT4 U24.GNDT5 U24.GNDT6 U24.GNDT7 U24.GNDT8
I2C_SCL: J1.21 R8.1 U1.6
I2C_SCL1: J2.21 R23.1 U7.6
I2C_SCL2: J5.21 R35.1 U11.6
I2C_SCL3: J7.21 R47.1 U15.6
I2C_SCL4: J9.21 R59.1 U19.6
I2C_SCL5: J11.21 R71.1 U23.6
I2C_SDA: J1.19 R9.1 U1.5
I2C_SDA1: J2.19 R24.1 U7.5
I2C_SDA2: J5.19 R36.1 U11.5
I2C_SDA3: J7.19 R48.1 U15.5
I2C_SDA4: J9.19 R60.1 U19.5
I2C_SDA5: J11.19 R72.1 U23.5
N$1: R1.1 U4.9
N$2: J3.A5 R3.2
N$3: J3.VBUS1 J3.VBUS2 R5.1
N$4: R5.2 R6.2 U4.8
N$5: J3.B5 R4.2
N$6: D1.C JP1.2
N$7: D1.A R7.1
N$8: J1.32 U1.3
N$9: J1.34 U1.2
N$10: Q2.5 R17.2
N$11: J1.36 U1.1
N$12: Q2.2 R18.2
N$13: JP2.1 R9.2
N$14: JP2.3 R8.2
N$15: Q1.5 R10.2
N$16: Q1.2 R11.2
N$17: J4.A5 R16.2
N$18: J4.B5 R19.2
N$19: R15.1 U6.9
N$20: J4.VBUS1 J4.VBUS2 R20.1
N$21: R20.2 R21.2 U6.8
N$22: D2.C JP3.2
N$23: D2.A R22.1
N$24: J2.32 U7.3
N$25: J2.34 U7.2
N$26: J2.36 U7.1
N$27: JP4.1 R24.2
N$28: JP4.3 R23.2
N$29: Q3.5 R25.2
N$30: Q3.2 R26.2
N$31: J6.A5 R30.2
N$32: J6.B5 R31.2
N$33: R29.1 U10.9
N$34: J6.VBUS1 J6.VBUS2 R32.1
N$35: R32.2 R33.2 U10.8
N$36: D3.C JP5.2
N$37: D3.A R34.1
N$38: J5.32 U11.3
N$39: J5.34 U11.2
N$40: J5.36 U11.1
N$41: JP6.1 R36.2
N$42: JP6.3 R35.2
N$43: Q4.5 R37.2
N$44: Q4.2 R38.2
N$45: J8.A5 R42.2
N$46: J8.B5 R43.2
N$47: R41.1 U14.9
N$48: J8.VBUS1 J8.VBUS2 R44.1
N$49: R44.2 R45.2 U14.8
N$50: D4.C JP7.2
N$51: D4.A R46.1
N$52: J7.32 U15.3
N$53: J7.34 U15.2
N$54: J7.36 U15.1
N$55: JP8.1 R48.2
N$56: JP8.3 R47.2
N$57: Q5.5 R49.2
N$58: Q5.2 R50.2
N$59: J10.A5 R54.2
N$60: J10.B5 R55.2
N$61: R53.1 U18.9
N$62: J10.VBUS1 J10.VBUS2 R56.1
N$63: R56.2 R57.2 U18.8
N$64: D5.C JP9.2
N$65: D5.A R58.1
N$66: J9.32 U19.3
N$67: J9.34 U19.2
N$68: J9.36 U19.1
N$69: JP10.1 R60.2
N$70: JP10.3 R59.2
N$71: Q6.5 R61.2
N$72: Q6.2 R62.2
N$73: J12.A5 R66.2
N$74: J12.B5 R67.2
N$75: R65.1 U22.9
N$76: J12.VBUS1 J12.VBUS2 R68.1
N$77: R68.2 R69.2 U22.8
N$78: D6.C JP11.2
N$79: D6.A R70.1
N$80: J11.32 U23.3
N$81: J11.34 U23.2
N$82: J11.36 U23.1
N$83: JP12.1 R72.2
N$84: JP12.3 R71.2
RTS: Q2.4 R18.1 U4.19
RTS1: Q1.4 R11.1 U6.19
RTS2: Q3.4 R26.1 U10.19
RTS3: Q4.4 R38.1 U14.19
RTS4: Q5.4 R50.1 U18.19
RTS5: Q6.4 R62.1 U22.19
RX: U2.35 U4.20
RX1: U6.20 U8.35
RX2: U10.20 U12.35
RX3: U14.20 U16.35
RX4: U18.20 U20.35
RX5: U22.20 U24.35
SHLD: J3.SHLD1 J3.SHLD2 J3.SHLD3 J3.SHLD4
SHLD1: J4.SHLD1 J4.SHLD2 J4.SHLD3 J4.SHLD4
SHLD2: J6.SHLD1 J6.SHLD2 J6.SHLD3 J6.SHLD4
SHLD3: J8.SHLD1 J8.SHLD2 J8.SHLD3 J8.SHLD4
SHLD4: J10.SHLD1 J10.SHLD2 J10.SHLD3 J10.SHLD4
SHLD5: J12.SHLD1 J12.SHLD2 J12.SHLD3 J12.SHLD4
TX: U2.34 U4.21
TX1: U6.21 U8.34
TX2: U10.21 U12.34
TX3: U14.21 U16.34
TX4: U18.21 U20.34
TX5: U22.21 U24.34
VCC: C6.1 J1.72 J1.74 R12.2 U3.1
VCC1: C3.1 J2.72 J2.74 R13.2 U5.1
VCC2: C8.1 J5.72 J5.74 R27.2 U9.1
VCC3: C11.1 J7.72 J7.74 R39.2 U13.1
VCC4: C14.1 J9.72 J9.74 R51.2 U17.1
VCC5: C17.1 J11.72 J11.74 R63.2 U21.1